# EAGLE board Schematic_proiect_pcb v13 (EAGLE 9.7.0)
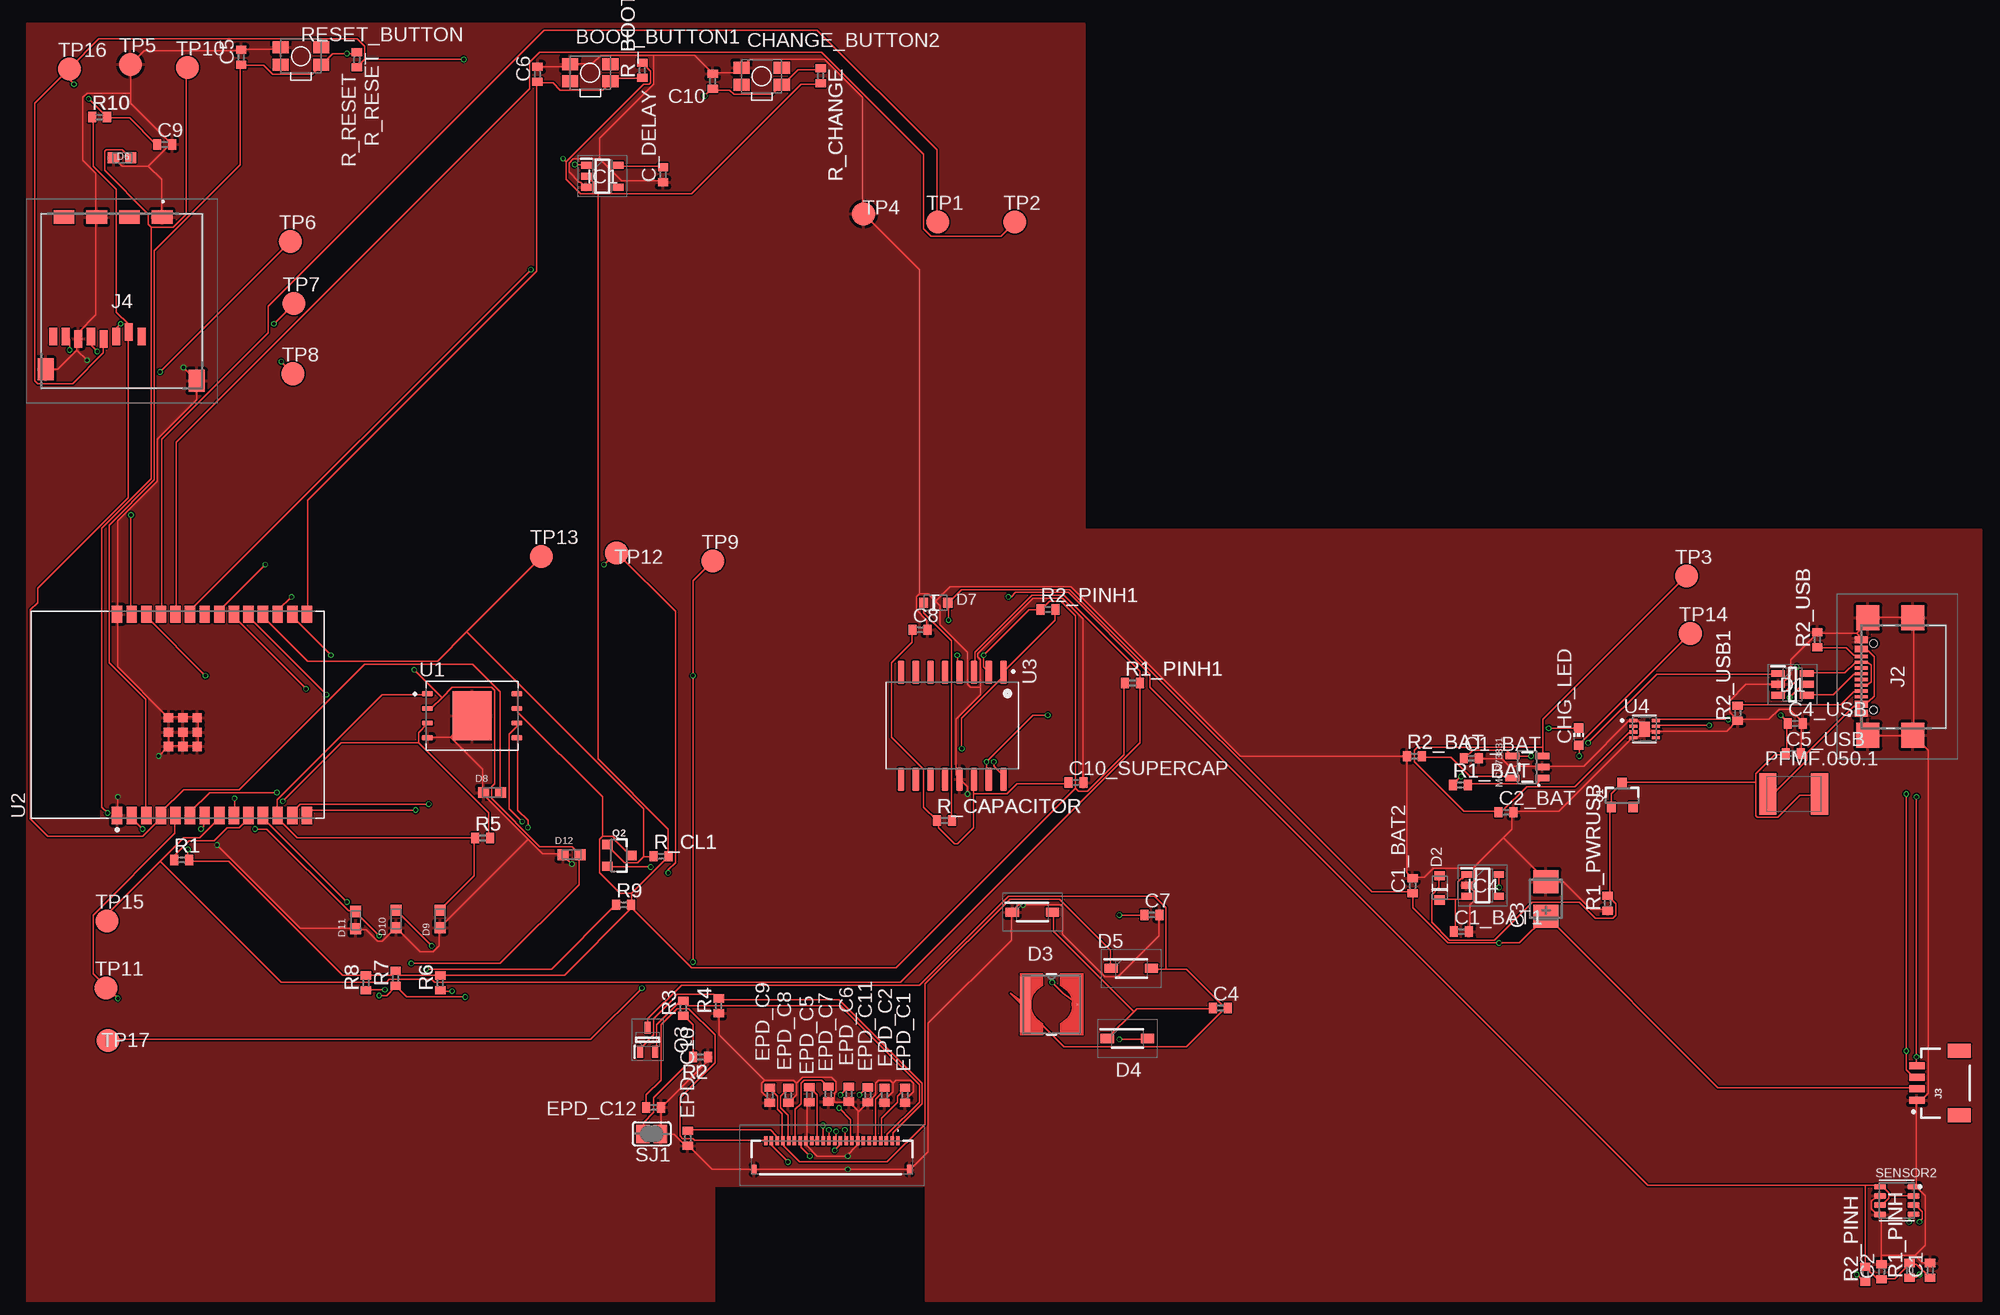
[diagram p0: board, top side]
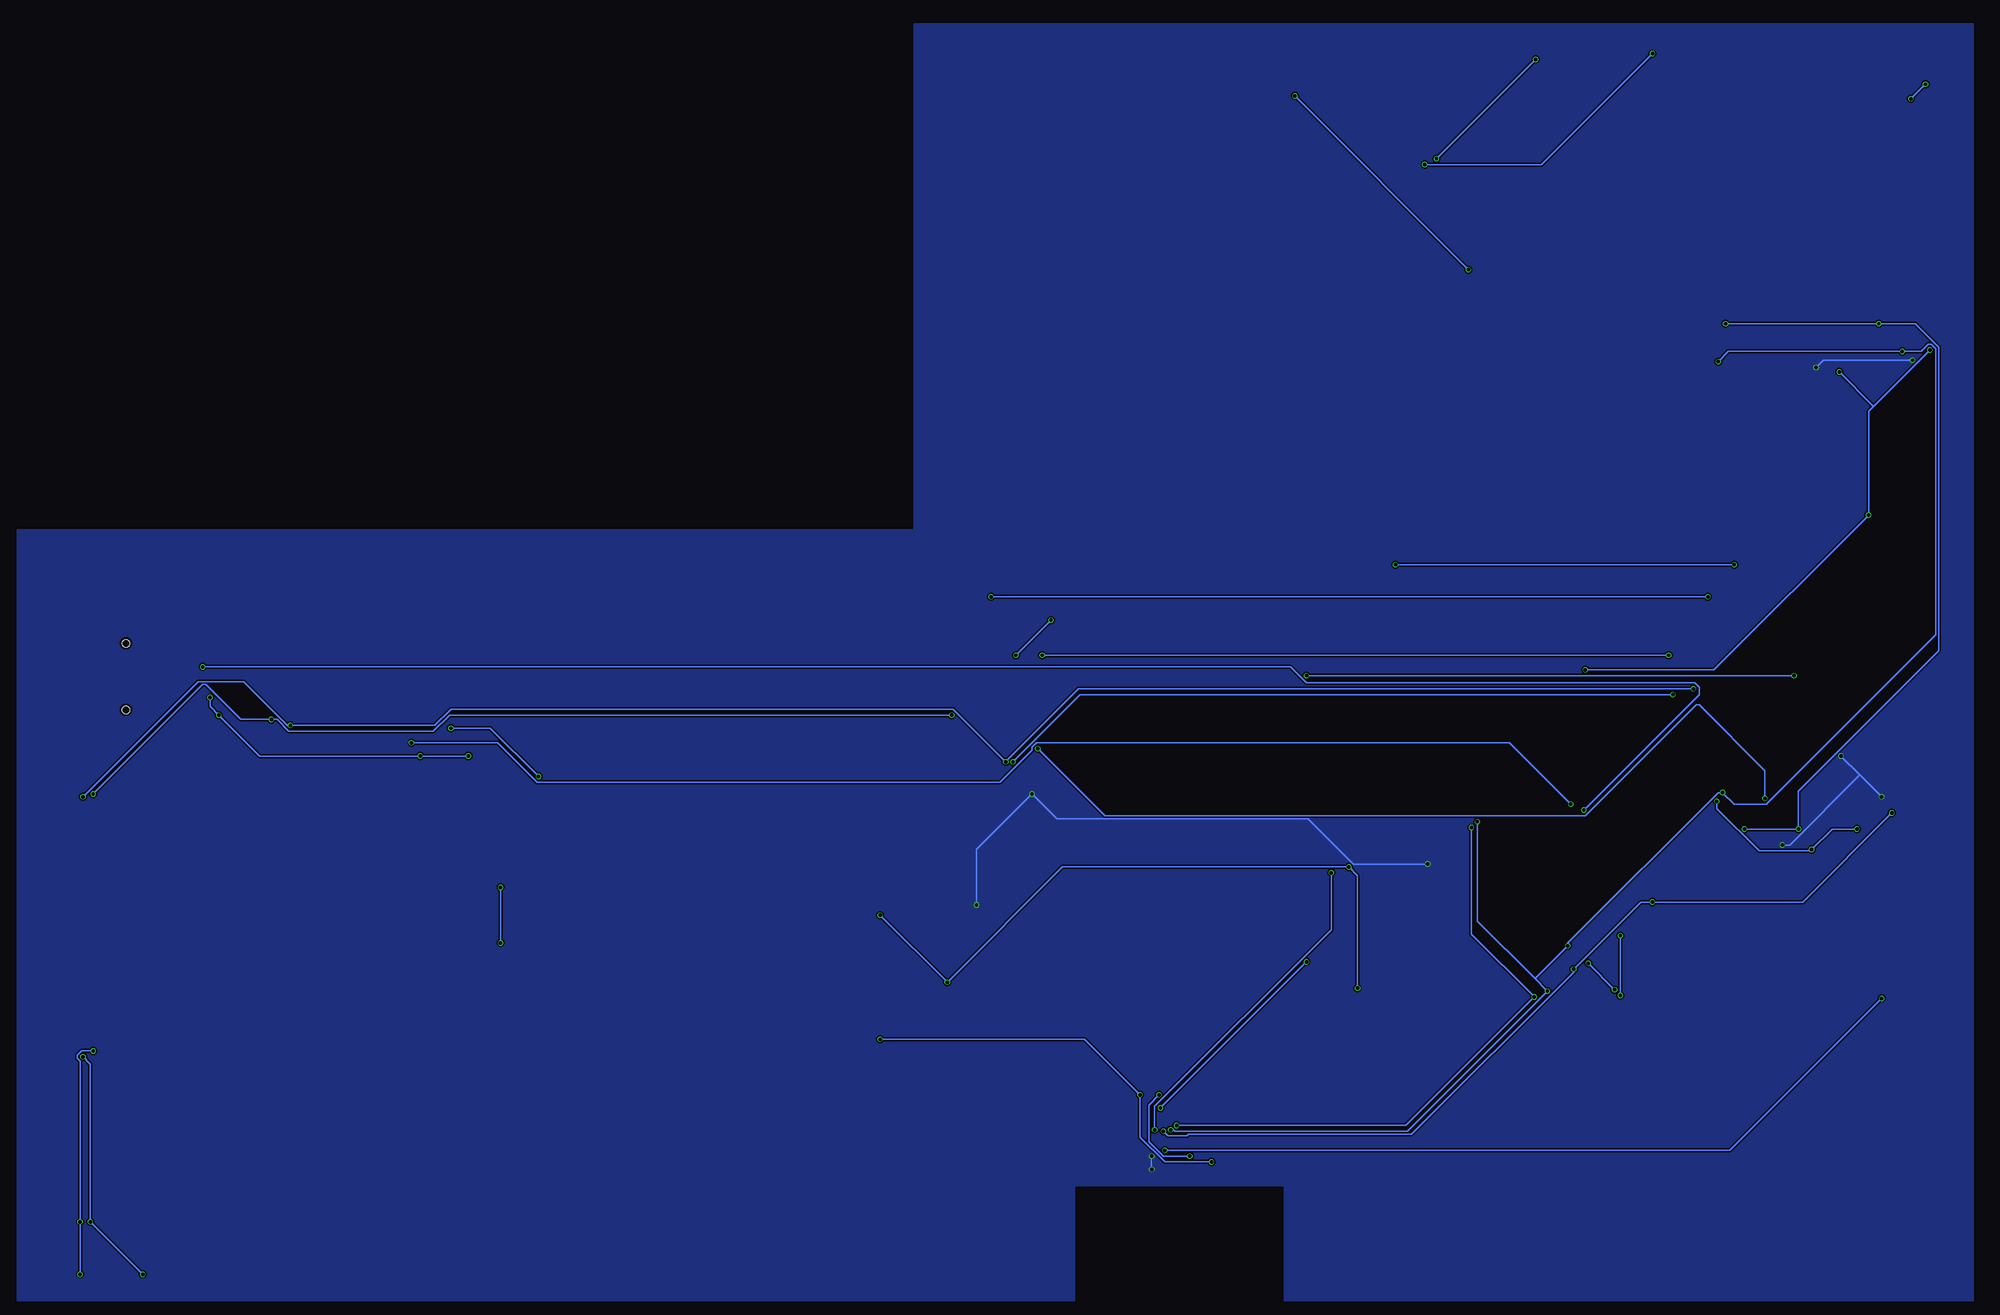
[diagram p1: board, bottom side, seen from below]

No outline drawn. Coordinates in mm, seen from the top.
Copper layers (1*16): Top 0.035mm / dielectric 1.6mm / Bottom 0.035mm
Design rules "jlcpcb-2layers.dru": minimum track width 5mil, minimum drill 0.3mm, track to track 5mil, track to pad 5mil, pad to pad 5mil, via to via 5mil, smd to smd 5mil, copper to edge 0.2mm, drill to drill 6mil, minimum pad ring 10mil, minimum via ring 3mil, stop-mask expansion 4mil, vias tented up to drill 0mil, thermal gap 10mil

## Footprints (pad centres in the part's own frame; a part is rotated, then mirrored left to right if it is on the bottom)
MYBUTTON = smd 1.4 x 1.05: 1 1.75,0.75; 2 -1.75,0.75; 3 -1.75,-0.75; 4 1.75,-0.75
EAGLE-LTSPICE_C0402 = smd 0.7 x 0.9: 1 -0.65,0; 2 0.65,0
RCL_CT3528 = smd 2 x 2.2: + -1.5,0; - 1.5,0
ADAFRUIT_CHIP-LED0603 = smd 0.8 x 0.8: A 0,-0.75; C 0,0.75
SOT95P280X145-6N = smd 1.2 x 0.6: 1 -1.25,0.95; 2 -1.25,0; 3 -1.25,-0.95; 4 1.25,-0.95; 5 1.25,0; 6 1.25,0.95
ESP32_WROVER_AVX---SD0805S020S1R0_AVX_SD0805S020S1R0_0 = smd 0.8 x 0.9: 1 -1.05,0; 2 1.05,0
SOD3716X135N = smd 1.15 x 0.8: 1 -1.75,0; 2 1.75,0
DIOC1608X36N = smd 0.97 x 0.94: 1 -0.75,0; 2 0.75,0
FH34SRJ24S05SH99 = smd 0.3 x 0.8: 1 5.75,1.45; 2 5.25,1.45; 3 4.75,1.45; 4 4.25,1.45; 5 3.75,1.45; 6 3.25,1.45; 7 2.75,1.45; 8 2.25,1.45; 9 1.75,1.45; 10 1.25,1.45; 11 0.75,1.45; 12 0.25,1.45; 13 -0.25,1.45; 14 -0.75,1.45; 15 -1.25,1.45; 16 -1.75,1.45; 17 -2.25,1.45; 18 -2.75,1.45; 19 -3.25,1.45; 20 -3.75,1.45; 21 -4.25,1.45; 22 -4.75,1.45; 23 -5.25,1.45; 24 -5.75,1.45 | smd 0.4 x 0.8: MP1 6.75,-1.05; MP2 -6.75,-1.05
SOT95P280X125-5N = smd 0.9 x 0.6: 1 -1.4,0.95; 2 -1.4,0; 3 -1.4,-0.95; 4 1.4,-0.95; 5 1.4,0.95
SOT95P280X120-5N = smd 0.9 x 0.6: 1 -1.4,0.95; 2 -1.4,0; 3 -1.4,-0.95; 4 1.4,-0.95; 5 1.4,0.95
SAMACSYS_PARTS_USB4110GFA = smd 0.3 x 1.15: A1 -3.35,3.678; A4 -2.55,3.678; A5 -1.25,3.678; A6 -0.25,3.678; A7 0.25,3.678; A8 1.25,3.678; A9 2.55,3.678; A12 3.35,3.678; B1 3.05,3.678; B4 2.25,3.678; B5 1.75,3.678; B6 0.75,3.678; B7 -0.75,3.678; B8 -1.75,3.678; B9 -2.25,3.678; B12 -3.05,3.678 | smd 2.18 x 2: MP1 -5.11,-0.827; MP2 5.11,-0.827; MP3 -5.11,3.103; MP4 5.11,3.103 | hole 0.65: -2.89,2.603; 2.89,2.603
JST04_1MM_RA = smd 0.6 x 1.35: 1 -1.5,0; 2 -0.5,0; 3 0.5,0; 4 1.5,0 | smd 1.2 x 2: NC1 2.8,-3.675; NC2 -2.8,-3.675
112ATAARR03ATTEND = smd 1.8 x 1.2: G1 10.6,10.4; G2 4.9,10.4; S1 7.75,10.4; S2 2.05,10.4 | smd 1.4 x 1.9: G3 13.6,-3.85; G4 0.45,-2.85 | smd 0.7 x 1.5: P1 8.8,0; P2 7.7,0.4; P3 6.6,0; P4 5.5,-0.2; P5 4.4,0; P6 3.3,-0.2; P7 2.2,0; P8 1.1,0
IND_4828-WE-TPC_WRE = smd 0.889 x 4.826: 1 -2.286,0 | smd 0.127 x 0.127: 2 2.286,0
ESP32_WROVER_SPARKFUN-IC-POWER_SOT23-5 = smd 0.55 x 1.2: 1 -0.95,-1.3; 2 0,-1.3; 3 0.95,-1.3; 4 0.95,1.3; 5 -0.95,1.3
ESP32C6_VARISTOR_CT/CN1812 = smd 1.5 x 3.6: 1 -2.25,0; 2 2.25,0
ESP32_WROVER_SPARKFUN-DISCRETESEMI_SOT23-3 = smd 0.8 x 0.9: 1 -0.95,-1; 2 0.95,-1; 3 0,1.1
SOT65P210X110-3N = smd 1.05 x 0.5: 1 -1.05,0.65; 2 -1.05,-0.65; 3 1.05,0
ESP32_WROVER_EAGLE-LTSPICE_R0402 = smd 0.7 x 0.9: 1 -0.65,0; 2 0.65,0
ESP32_WROVER_BME680_PSON80P300X300X100-8N = smd 1.016 x 0.5: 1 1.458,1.2; 2 1.458,0.4; 3 1.458,-0.4; 4 1.458,-1.2; 5 -1.458,-1.22; 6 -1.458,-0.4; 7 -1.458,0.4; 8 -1.458,1.2
SJ = smd 1.168 x 1.6: 1 -0.762,0; 2 0.762,0
TP20R = smd 2 x 2: TP 0,0
SON127P600X800X80-9N = smd 0.94 x 0.44: 1 -3.895,1.905; 2 -3.895,0.635; 3 -3.895,-0.635; 4 -3.895,-1.905; 5 3.895,-1.905; 6 3.895,-0.635; 7 3.895,0.635; 8 3.895,1.905 | smd 3.4 x 4.3: 9 0,0
XCVR_ESP32-C6-WROOM-1-N8 = smd 1.5 x 0.9: 1 -8.75,5.26; 2 -8.75,3.99; 3 -8.75,2.72; 4 -8.75,1.45; 5 -8.75,0.18; 6 -8.75,-1.09; 7 -8.75,-2.36; 8 -8.75,-3.63; 9 -8.75,-4.9; 10 -8.75,-6.17; 11 -8.75,-7.44; 12 -8.75,-8.71; 13 -8.75,-9.98; 14 -8.75,-11.25; 15 8.75,-11.25; 16 8.75,-9.98; 17 8.75,-8.71; 18 8.75,-7.44; 19 8.75,-6.17; 20 8.75,-4.9; 21 8.75,-3.63; 22 8.75,-2.36; 23 8.75,-1.09; 24 8.75,0.18; 25 8.75,1.45; 26 8.75,2.72; 27 8.75,3.99; 28 8.75,5.26 | smd 0.8 x 0.8: 29_1 -2.755,0.79; 29_2 -1.505,0.79; 29_3 -0.255,0.79; 29_4 -2.755,-0.46; 29_5 -1.505,-0.46; 29_6 -0.255,-0.46; 29_7 -2.755,-1.71; 29_8 -1.505,-1.71; 29_9 -0.255,-1.71
SOIC127P1032X265-16N = smd 2.05 x 0.59: 1 -4.655,4.445; 2 -4.655,3.175; 3 -4.655,1.905; 4 -4.655,0.635; 5 -4.655,-0.635; 6 -4.655,-1.905; 7 -4.655,-3.175; 8 -4.655,-4.445; 9 4.655,-4.445; 10 4.655,-3.175; 11 4.655,-1.905; 12 4.655,-0.635; 13 4.655,0.635; 14 4.655,1.905; 15 4.655,3.175; 16 4.655,4.445
SON50P200X200X80-9N = smd 0.76 x 0.27: 1 -0.985,0.75; 2 -0.985,0.25; 3 -0.985,-0.25; 4 -0.985,-0.75; 5 0.985,-0.75; 6 0.985,-0.25; 7 0.985,0.25; 8 0.985,0.75 | smd 0.9 x 1.3: 9 0,0

## Placement (x,y rotation side)
BOOT_BUTTON1  BUTTON_CUSYOMV1  [MYBUTTON]  49.1,83.67 0 top
C1  100uF  [EAGLE-LTSPICE_C0402]  165.65,-20.48 90 top
C1_BAT  4.7uF  [EAGLE-LTSPICE_C0402]  125.75,24.06 0 top
C1_BAT1  4.7uF  [EAGLE-LTSPICE_C0402]  124.89,8.98 0 top
C1_BAT2  4.7uF  [EAGLE-LTSPICE_C0402]  120.63,12.98 90 top
C2  100uF  [EAGLE-LTSPICE_C0402]  161.43,-20.58 90 top
C2_BAT  4.7uF  [EAGLE-LTSPICE_C0402]  128.76,19.36 0 top
C3  100uF  [RCL_CT3528]  132.23,11.84 90 top
C4  10uF  [EAGLE-LTSPICE_C0402]  103.9,2.34 0 top
C4_USB  100nF  [EAGLE-LTSPICE_C0402]  153.93,27.08 0 top
C5  1uF  [EAGLE-LTSPICE_C0402]  18.73,85.02 90 top
C5_USB  100nF  [EAGLE-LTSPICE_C0402]  153.74,24.48 0 top
C6  100nF  [EAGLE-LTSPICE_C0402]  44.51,83.54 90 top
C7  10uF  [EAGLE-LTSPICE_C0402]  97.95,10.44 0 top
C8  100uF  [EAGLE-LTSPICE_C0402]  77.79,35.24 0 top
C9  100nF  [EAGLE-LTSPICE_C0402]  12.07,77.44 0 top
C10  100nF  [EAGLE-LTSPICE_C0402]  59.75,82.94 90 top
C10_SUPERCAP  100uF  [EAGLE-LTSPICE_C0402]  91.34,21.95 0 top
C_DELAY  100nF  [EAGLE-LTSPICE_C0402]  55.44,74.8 90 top
CHANGE_BUTTON2  BUTTON_CUSYOMV1  [MYBUTTON]  64.01,83.37 0 top
CHG_LED  [ADAFRUIT_CHIP-LED0603]  135.08,25.95 0 top
D1  USBLC6-2SC6Y  [SOT95P280X145-6N]  153.68,30.48 0 top
D2  ESP32_WROVER_AVX---SD0805S020S1R0_AVX_SD0805S020S1R0_0_0AVX_SD0805S020S1R0_0_0  [ESP32_WROVER_AVX---SD0805S020S1R0_AVX_SD0805S020S1R0_0]  122.99,12.79 90 top
D3  MBR0530  [SOD3716X135N]  87.56,10.68 0 top
D4  MBR0530  [SOD3716X135N]  95.82,-0.31 0 top
D5  MBR0530  [SOD3716X135N]  96.16,5.79 0 top
D6  PGB1010603MR  [DIOC1608X36N]  8.38,76.28 0 top
D7  ESP32_WROVER_AVX---SD0805S020S1R0_AVX_SD0805S020S1R0_0_0AVX_SD0805S020S1R0_0_0  [ESP32_WROVER_AVX---SD0805S020S1R0_AVX_SD0805S020S1R0_0]  79.14,37.59 0 top
D8  PGB1010603MR  [DIOC1608X36N]  40.56,21.08 0 top
D9  PGB1010603MR  [DIOC1608X36N]  36.04,10.08 90 top
D10  PGB1010603MR  [DIOC1608X36N]  32.22,10.08 90 top
D11  PGB1010603MR  [DIOC1608X36N]  28.7,9.98 90 top
D12  PGB1010603MR  [DIOC1608X36N]  47.48,15.68 0 top
EPD_C1  1uF/50V  [EAGLE-LTSPICE_C0402]  76.48,-5.24 90 top
EPD_C2  1uF/50V  [EAGLE-LTSPICE_C0402]  74.69,-5.24 90 top
EPD_C5  0.1uF/50V  [EAGLE-LTSPICE_C0402]  68.16,-5.2 90 top
EPD_C6  1uF/50V  [EAGLE-LTSPICE_C0402]  71.6,-5.14 90 top
EPD_C7  1uF/50V  [EAGLE-LTSPICE_C0402]  69.81,-5.14 90 top
EPD_C8  1uF/50V  [EAGLE-LTSPICE_C0402]  66.32,-5.24 90 top
EPD_C9  1uF/50V  [EAGLE-LTSPICE_C0402]  64.73,-5.24 90 top
EPD_C10  1uF/50V  [EAGLE-LTSPICE_C0402]  57.58,-9 90 top
EPD_C11  1uF/50V  [EAGLE-LTSPICE_C0402]  73.25,-5.22 90 top
EPD_C12  1uF/50V  [EAGLE-LTSPICE_C0402]  54.62,-6.3 180 top
FH34SRJ-24S-0.5SH_99_  FH34SRJ-24S-0.5SH_99_  [FH34SRJ24S05SH99]  70.11,-10.66 0 top
IC1  BD5229G-TR  [SOT95P280X125-5N]  50.15,74.68 0 top
IC4  XC6220A331MR-G  [SOT95P280X120-5N]  126.73,13 0 top
J2  SAMACSYS_PARTS_USB4110-GF-A  [SAMACSYS_PARTS_USB4110GFA]  163.33,31.16 90 top
J3  QWIIC_RIGHT_ANGLE  [JST04_1MM_RA]  164.51,-4.18 90 top
J4  112A-TAAR-R03_ATTEND  [112ATAARR03ATTEND]  1.27,60.73 0 top
L1  744043680IND_4828-WE-TPC_WRE  [IND_4828-WE-TPC_WRE]  89.23,2.65 0 top
MCP73831  ESP32_WROVER_SPARKFUN-IC-POWER_MCP73831  [ESP32_WROVER_SPARKFUN-IC-POWER_SOT23-5]  130.61,23.3 90 top
PFMF.050.1  ESP32C6_VARISTORCN1812  [ESP32C6_VARISTOR_CT/CN1812]  153.78,20.94 0 top
Q1  20V/4.2A/52mΩ/1.4W  [ESP32_WROVER_SPARKFUN-DISCRETESEMI_SOT23-3]  138.86,20.81 0 top
Q2  20V/4.2A/52mΩ/1.4W  [ESP32_WROVER_SPARKFUN-DISCRETESEMI_SOT23-3]  51.58,15.61 270 top
Q3  SI1308EDL-T1-GE3  [SOT65P210X110-3N]  54.09,-0.41 90 top
R1  10k  [ESP32_WROVER_EAGLE-LTSPICE_R0402]  13.55,15.22 0 top
R1_BAT  200  [ESP32_WROVER_EAGLE-LTSPICE_R0402]  124.78,21.74 0 top
R1_PINH  10k  [ESP32_WROVER_EAGLE-LTSPICE_R0402]  163.87,-20.48 90 top
R1_PINH1  10k  [ESP32_WROVER_EAGLE-LTSPICE_R0402]  96.28,30.6 0 top
R1_PWRUSB  100k  [ESP32_WROVER_EAGLE-LTSPICE_R0402]  137.6,11.45 90 top
R2  2.2  [ESP32_WROVER_EAGLE-LTSPICE_R0402]  58.71,-1.92 180 top
R2_BAT  2K  [ESP32_WROVER_EAGLE-LTSPICE_R0402]  120.79,24.24 0 top
R2_PINH  10k  [ESP32_WROVER_EAGLE-LTSPICE_R0402]  160.01,-20.82 90 top
R2_PINH1  10k  [ESP32_WROVER_EAGLE-LTSPICE_R0402]  88.92,37 0 top
R2_USB  5k1  [ESP32_WROVER_EAGLE-LTSPICE_R0402]  155.84,34.36 90 top
R2_USB1  5k1  [ESP32_WROVER_EAGLE-LTSPICE_R0402]  148.91,27.98 90 top
R3  0.47  [ESP32_WROVER_EAGLE-LTSPICE_R0402]  57.19,2.32 90 top
R4  10k  [ESP32_WROVER_EAGLE-LTSPICE_R0402]  60.27,2.52 90 top
R5  10K  [ESP32_WROVER_EAGLE-LTSPICE_R0402]  39.73,17.12 0 top
R6  10K  [ESP32_WROVER_EAGLE-LTSPICE_R0402]  36.05,4.52 90 top
R7  10K  [ESP32_WROVER_EAGLE-LTSPICE_R0402]  32.17,4.92 90 top
R8  10K  [ESP32_WROVER_EAGLE-LTSPICE_R0402]  29.59,4.52 90 top
R9  10K  [ESP32_WROVER_EAGLE-LTSPICE_R0402]  52.01,11.32 0 top
R10  10K  [ESP32_WROVER_EAGLE-LTSPICE_R0402]  6.41,79.82 0 top
R_BOOT  10K  [ESP32_WROVER_EAGLE-LTSPICE_R0402]  53.62,83.88 90 top
R_CAPACITOR  10k  [ESP32_WROVER_EAGLE-LTSPICE_R0402]  79.9,18.65 0 top
R_CHANGE  10K  [ESP32_WROVER_EAGLE-LTSPICE_R0402]  69.14,83.4 270 top
R_CL1  10k  [ESP32_WROVER_EAGLE-LTSPICE_R0402]  55.27,15.54 0 top
R_RESET  10K  [ESP32_WROVER_EAGLE-LTSPICE_R0402]  28.8,84.8 270 top
RESET_BUTTON  BUTTON_CUSYOMV1  [MYBUTTON]  23.93,85.13 0 top
SENSOR2  ESP32_WROVER_BME680_BME680  [ESP32_WROVER_BME680_PSON80P300X300X100-8N]  162.74,-14.4 0 top
SJ1  [SJ]  54.44,-8.6 180 top
TP1  TPTP20R  [TP20R]  79.31,70.7 0 top
TP2  TPTP20R  [TP20R]  86.03,70.7 0 top
TP3  TPTP20R  [TP20R]  144.45,39.9 0 top
TP4  TPTP20R  [TP20R]  72.87,71.4 0 top
TP5  TPTP20R  [TP20R]  9.09,84.4 0 top
TP6  TPTP20R  [TP20R]  23.01,69 0 top
TP7  TPTP20R  [TP20R]  23.33,63.6 0 top
TP8  TPTP20R  [TP20R]  23.25,57.5 0 top
TP9  TPTP20R  [TP20R]  59.77,41.2 0 top
TP10  TPTP20R  [TP20R]  14.04,84.12 0 top
TP11  TPTP20R  [TP20R]  6.99,4.1 0 top
TP12  TPTP20R  [TP20R]  51.39,41.92 0 top
TP13  TPTP20R  [TP20R]  44.84,41.62 0 top
TP14  TPTP20R  [TP20R]  144.79,34.92 0 top
TP15  TPTP20R  [TP20R]  7.04,9.92 0 top
TP16  TPTP20R  [TP20R]  3.79,84 0 top
TP17  TPTP20R  [TP20R]  7.14,-0.5 0 top
U1  W25Q512JVEIQ  [SON127P600X800X80-9N]  38.83,27.76 0 top
U2  ESP32-C6-WROOM-1-N8  [XCVR_ESP32-C6-WROOM-1-N8]  13.2,27.84 90 top
U3  DS3231SN#  [SOIC127P1032X265-16N]  80.59,26.9 270 top
U4  MAX17048G+T10  [SON50P200X200X80-9N]  140.8,26.6 0 top

## Library data of the parts
BOOT_BUTTON1 CHANGE_BUTTON2 CHG_LED PFMF.050.1 RESET_BUTTON SJ1 TP1-TP17 = DeskAssistant v19 v1
C1 C1_BAT C1_BAT1 C1_BAT2 C2 C2_BAT C4 C4_USB C5 C5_USB C6-C10 C10_SUPERCAP C_DELAY EPD_C1 EPD_C2 EPD_C5-EPD_C12 = DeskAssistant v19 v1; SPICEMODEL: NONE; SPICEPREFIX: C
C3 = DeskAssistant v19 v1; SPICEPREFIX: C
D1 = DeskAssistant v19 v1; AVAILABILITY: In Stock; CHECK_PRICES: https://www.snapeda.com/parts/USBLC6-2SC6Y/STMicroelectronics/view-part/?ref=eda; DESCRIPTION: 17V Clamp 5A (8/20µs) Ipp Tvs Diode Surface Mount SOT-23-6; MF: STMicroelectronics; MP: USBLC6-2SC6Y; PACKAGE: SOT-23-6 STMicroelectronics; PRICE: None; SNAPEDA_LINK: https://www.snapeda.com/parts/USBLC6-2SC6Y/STMicroelectronics/view-part/?ref=snap
D2 D7 = DeskAssistant v19 v1; CENTROID_NOT_SPECIFIED: No; DATASHEET: http://datasheets.avx.com/schottky.pdf; DIGIKEY_DESCRIPTION: DIODE SCHOTTKY 20V 1A 0805; DIGIKEY_PART_NUMBER: 478-7800-1-ND; LEAD_FREE: yes; MF: AVX; MOUSER_PART_NUMBER: 581-SD0805S020S1R0; PACKAGE: 0805 (2012 metric); PREFIX: D; ROHS: yes; TEMPERATURE_RANGE_HIGH: +125°C; TEMPERATURE_RANGE_LOW: -55°C
D3-D5 = DeskAssistant v19 v1; AVAILABILITY: In Stock; CHECK_PRICES: https://www.snapeda.com/parts/MBR0530/Onsemi/view-part/?ref=eda; DESCRIPTION: Diode Schottky 30 V 500mA Surface Mount SOD-123; MF: ON Semiconductor; MP: MBR0530; PACKAGE: SOD-123-2 ON Semiconductor; PRICE: None; PURCHASE-URL: https://www.snapeda.com/api/url_track_click_mouser/?unipart_id=179458&manufacturer=ON Semiconductor&part_name=MBR0530&search_term=None; SNAPEDA_LINK: https://www.snapeda.com/parts/MBR0530/Onsemi/view-part/?ref=snap
D6 D8-D12 = DeskAssistant v19 v1; AVAILABILITY: In Stock; CHECK_PRICES: https://www.snapeda.com/parts/PGB1010603MR/Littelfuse/view-part/?ref=eda; DESCRIPTION: 150V (Typ) Clamp - Ipp Tvs Diode Surface Mount 0603 (1608 Metric); MF: Littelfuse Inc.; MP: PGB1010603MR; PACKAGE: 0603 Littelfuse Inc.; PRICE: None; PURCHASE-URL: https://www.snapeda.com/api/url_track_click_mouser/?unipart_id=5659453&manufacturer=Littelfuse Inc.&part_name=PGB1010603MR&search_term=None; SNAPEDA_LINK: https://www.snapeda.com/parts/PGB1010603MR/Littelfuse/view-part/?ref=snap
FH34SRJ-24S-0.5SH_99_ = DeskAssistant v19 v1; DESCRIPTION: 24 Position FFC, FPC Connector Contacts, Top and Bottom 0.020" (0.50mm) Surface Mount, Right Angle; HEIGHT: 1.1mm; MANUFACTURER_NAME: Hirose; MANUFACTURER_PART_NUMBER: FH34SRJ-24S-0.5SH(99); MOUSER_PART_NUMBER: 798-FH34SRJ24S05SH99; MOUSER_PRICE-STOCK: https://www.mouser.co.uk/ProductDetail/Hirose-Connector/FH34SRJ-24S-0.5SH99?qs=vcbW%252B4%252BSTIpKBl5ap9J8Fw%3D%3D
IC1 = DeskAssistant v19 v1; DESCRIPTION: Voltage Detector with Adjustable Delay Time: CMOS processes are utilized to develop high precision, low current consumption CMOS reset ICs that allow arbitrary setting of the delay time. The extensive lineup includes both Nch Open Drain and CMOS output types in a wide range of detection voltages (from 2.3V to 6.0V, in 0.1V steps), enabling selection of the ideal solution based on customer requirements. In addition, the entire series is of course both lead-free and RoHS-compliant.; HEIGHT: 1.25mm; MANUFACTURER_NAME: ROHM Semiconductor; MANUFACTURER_PART_NUMBER: BD5229G-TR; MOUSER_PART_NUMBER: 755-BD5229G-TR; MOUSER_PRICE-STOCK: https://www.mouser.co.uk/ProductDetail/ROHM-Semiconductor/BD5229G-TR?qs=4kLU8WoGk0vvnhrrYwdszw%3D%3D
IC4 = DeskAssistant v19 v1; DESCRIPTION: LDO Voltage Regulators; HEIGHT: 1.2mm; MANUFACTURER_NAME: Torex; MANUFACTURER_PART_NUMBER: XC6220A331MR-G; MOUSER_PART_NUMBER: 865-XC6220A331MR-G; MOUSER_PRICE-STOCK: https://www.mouser.co.uk/ProductDetail/Torex-Semiconductor/XC6220A331MR-G?qs=AsjdqWjXhJ8ZSWznL1J0gg%3D%3D
J2 = DeskAssistant v19 v1; DESCRIPTION: CONN USB 2.0 TYPE-C R/A SMT; HEIGHT: 3.26mm; MANUFACTURER_NAME: GCT (GLOBAL CONNECTOR TECHNOLOGY); MANUFACTURER_PART_NUMBER: USB4110-GF-A; MOUSER_PART_NUMBER: 640-USB4110-GF-A; MOUSER_PRICE-STOCK: https://www.mouser.co.uk/ProductDetail/GCT/USB4110-GF-A?qs=KUoIvG%2F9IlYiZvIXQjyJeA%3D%3D
J3 = DeskAssistant v19 v1; PROD_ID: CONN-13694
J4 = DeskAssistant v19 v1; DESCRIPTION: Micro SD Card Socket, Push-Push Type, Top Mount, SMT, H=1.83mm, 10u; HEIGHT: 1.9mm; MANUFACTURER_NAME: ATTEND; MANUFACTURER_PART_NUMBER: 112A-TAAR-R03 ATTEND
L1 = DeskAssistant v19 v1; COPYRIGHT: Copyright (C) 2024 Ultra Librarian. All rights reserved.; MANUFACTURER_PART_NUMBER: 744043680; MFR_NAME: Wurth Electronics
MCP73831 = DeskAssistant v19 v1; PROD_ID: IC-09995
Q1 Q2 = DeskAssistant v19 v1; PROD_ID: TRAN-14388
Q3 = DeskAssistant v19 v1; AVAILABILITY: In Stock; CHECK_PRICES: https://www.snapeda.com/parts/SI1308EDL-T1-GE3/Vishay+Siliconix/view-part/?ref=eda; DESCRIPTION: Si1308EDL-T1-GE3 N-channel MOSFET Transistor, 1.5 A, 30 V, 3-Pin SC-70 | Siliconix / Vishay SI1308EDL-T1-GE3; MF: Vishay Siliconix; MP: SI1308EDL-T1-GE3; PACKAGE: SOT-323 Vishay Semiconductor; PRICE: None; PURCHASE-URL: https://www.snapeda.com/api/url_track_click_mouser/?unipart_id=274603&manufacturer=Vishay Siliconix&part_name=SI1308EDL-T1-GE3&search_term=None; SNAPEDA_LINK: https://www.snapeda.com/parts/SI1308EDL-T1-GE3/Vishay+Siliconix/view-part/?ref=snap
R1 R1_BAT R1_PINH R1_PINH1 R1_PWRUSB R2 R2_BAT R2_PINH R2_PINH1 R2_USB R2_USB1 R3-R10 R_BOOT R_CAPACITOR R_CHANGE R_CL1 R_RESET = DeskAssistant v19 v1; SPICEMODEL: NONE; SPICEPREFIX: R
SENSOR2 = DeskAssistant v19 v1; AVAILABILITY: Unavailable; DESCRIPTION: Integrated Environmental Unit; MF: Bosch Sensortec; MP: BME680; PACKAGE: LGA-8 Bosch Tools; PRICE: None
U1 = DeskAssistant v19 v1; AVAILABILITY: In Stock; CHECK_PRICES: https://www.snapeda.com/parts/W25Q512JVEIQ/Winbond+Electronics/view-part/?ref=eda; DESCRIPTION: FLASH - NOR Memory IC 512Mb (64M x 8) SPI - Quad I/O 133 MHz 8-WSON (8x6); MF: Winbond Electronics; MP: W25Q512JVEIQ; PACKAGE: Package; PRICE: None; SNAPEDA_LINK: https://www.snapeda.com/parts/W25Q512JVEIQ/Winbond+Electronics/view-part/?ref=snap
U2 = DeskAssistant v19 v1; AVAILABILITY: In Stock; CHECK_PRICES: https://www.snapeda.com/parts/ESP32-C6-WROOM-1-N8/Espressif+Systems/view-part/?ref=eda; DESCRIPTION: Multiprotocol Modules ESP32-C6 module, Wi-Fi 6 in 2.4 GHz band, Bluetooth 5, Zigbee 3.0 and Thread. ESP34-WROOM Compatible - ENGINEERING SAMPLE; MF: Espressif Systems; MP: ESP32-C6-WROOM-1-N8; PACKAGE: None; PRICE: None; SNAPEDA_LINK: https://www.snapeda.com/parts/ESP32-C6-WROOM-1-N8/Espressif+Systems/view-part/?ref=snap
U3 = DeskAssistant v19 v1; AVAILABILITY: In Stock; CHECK_PRICES: https://www.snapeda.com/parts/DS3231SN%23/Analog+Devices/view-part/?ref=eda; DESCRIPTION: Extremely Accurate I²C-Integrated RTC/TCXO/Crystal; MF: Analog Devices; MP: DS3231SN#; PACKAGE: SOIC-16 Maxim; PRICE: None; PURCHASE-URL: https://www.snapeda.com/api/url_track_click_mouser/?unipart_id=99048&manufacturer=Analog Devices&part_name=DS3231SN#&search_term=None; SNAPEDA_LINK: https://www.snapeda.com/parts/DS3231SN%23/Analog+Devices/view-part/?ref=snap
U4 = DeskAssistant v19 v1; AVAILABILITY: In Stock; CHECK_PRICES: https://www.snapeda.com/parts/MAX17048G+T10/Analog+Devices/view-part/?ref=eda; DESCRIPTION: 3µA 1-Cell/2-Cell Fuel Gauge with ModelGauge; MF: Analog Devices; MP: MAX17048G+T10; PACKAGE: TDFN-8 Maxim; PRICE: None; PURCHASE-URL: https://www.snapeda.com/api/url_track_click_mouser/?unipart_id=329239&manufacturer=Analog Devices&part_name=MAX17048G+T10&search_term=None; SNAPEDA_LINK: https://www.snapeda.com/parts/MAX17048G+T10/Analog+Devices/view-part/?ref=snap

## Nets
3V3: C1_BAT2.1 C3.+ C9.1 D7.2 IC1.2 IC4.5 J3.2 J4.P4 Q2.3 R1.2 R1_PINH1.1 R2_PINH1.1 R5.2 R6.2 R7.2 R8.2 R9.2 R10.2 R_BOOT.2 R_CHANGE.2 R_CL1.2 R_RESET.2 TP16.TP U1.3 U1.7 U1.8 U2.2 U3.2
32KHZ: R2_PINH1.2 U2.9 U3.1
DN: D1.6 J2.A8 J2.B7
DP: D1.4 J2.A7 J2.B6
EPD_3V3: C7.1 L1.2 Q2.2 TP17.TP
EPD_3V3_C: Q2.1 R_CL1.1 TP13.TP U2.18
EPD_BUSY: FH34SRJ-24S-0.5SH_99_.9 TP9.TP U2.26
EPD_CS: D6.2 FH34SRJ-24S-0.5SH_99_.12 R9.1 TP10.TP U2.11
EPD_DC: FH34SRJ-24S-0.5SH_99_.11 TP11.TP U2.5
EPD_RST: FH34SRJ-24S-0.5SH_99_.10 TP12.TP U2.21
FLASH_CS: D9.2 R5.1 U1.1 U2.12
GDR: FH34SRJ-24S-0.5SH_99_.2 Q3.1 R4.2
GND: BOOT_BUTTON1.2 C1.2 C1_BAT1.2 C1_BAT2.2 C1_BAT.2 C2.2 C2_BAT.2 C3.- C4_USB.2 C5.2 C5_USB.2 C6.2 C7.2 C8.2 C9.2 C10.2 C10_SUPERCAP.2 C_DELAY.1 CHANGE_BUTTON2.2 D1.2 D3.1 D6.1 D8.1 D9.1 D10.1 D11.1 D12.1 EPD_C1.1 EPD_C2.1 EPD_C5.1 EPD_C6.1 EPD_C7.1 EPD_C8.1 EPD_C9.1 EPD_C10.1 EPD_C11.1 EPD_C12.1 FH34SRJ-24S-0.5SH_99_.8 FH34SRJ-24S-0.5SH_99_.17 FH34SRJ-24S-0.5SH_99_.MP1 FH34SRJ-24S-0.5SH_99_.MP2 IC1.3 IC4.2 J2.A1 J2.A12 J2.B1 J2.B12 J2.MP1 J2.MP2 J2.MP3 J2.MP4 J3.1 J4.G1 J4.G2 J4.G3 J4.G4 J4.P6 MCP73831.2 R1_PWRUSB.1 R2.1 R2_BAT.1 R2_USB1.1 R2_USB.2 R4.1 RESET_BUTTON.2 SENSOR2.1 SENSOR2.5 SENSOR2.7 SJ1.1 TP4.TP TP5.TP U1.4 U1.9 U2.1 U2.28 U2.29_1 U2.29_2 U2.29_3 U2.29_4 U2.29_5 U2.29_6 U2.29_7 U2.29_8 U2.29_9 U3.13 U4.1 U4.4 U4.6 U4.9
GPIO8: R1.1 U2.10
I2C_PW: C1.1 C2.1 R1_PINH.2 R2_PINH.2 SENSOR2.2 SENSOR2.6 SENSOR2.8 U2.17
INT_RTC: R1_PINH1.2 TP15.TP U2.8 U3.3
IO/BOOT: BOOT_BUTTON1.4 C6.1 R_BOOT.1 U2.15
IO/CHANGE: C10.1 CHANGE_BUTTON2.4 R_CHANGE.1 U2.23
MISO: D12.2 J4.P7 R8.1 TP6.TP U1.2 U2.27
MOSI: D11.2 FH34SRJ-24S-0.5SH_99_.14 J4.P3 R7.1 TP7.TP U1.5 U2.7
N$1: J2.A5 R2_USB1.2
N$2: J2.B5 R2_USB.1
N$3: D7.1 R_CAPACITOR.2
N$5: MCP73831.1 R1_BAT.2
N$8: C4.1 D3.2 D4.1
N$9: CHG_LED.C R1_BAT.1
N$10: MCP73831.5 R2_BAT.2
N$11: EPD_C12.2 FH34SRJ-24S-0.5SH_99_.24
N$12: EPD_C5.2 FH34SRJ-24S-0.5SH_99_.15 FH34SRJ-24S-0.5SH_99_.16
N$13: EPD_C8.2 FH34SRJ-24S-0.5SH_99_.20
N$14: EPD_C10.2 FH34SRJ-24S-0.5SH_99_.22
N$15: EPD_C7.2 FH34SRJ-24S-0.5SH_99_.19
N$16: EPD_C6.2 FH34SRJ-24S-0.5SH_99_.18
N$17: EPD_C2.2 FH34SRJ-24S-0.5SH_99_.5
N$18: EPD_C1.2 FH34SRJ-24S-0.5SH_99_.4
N$19: C_DELAY.2 IC1.5
N$20: C1_BAT1.1 D2.1 IC4.1 IC4.3
PREVGH: D5.1 EPD_C9.2 FH34SRJ-24S-0.5SH_99_.21
PREVGL: D4.2 EPD_C11.2 FH34SRJ-24S-0.5SH_99_.23
RESE: FH34SRJ-24S-0.5SH_99_.3 Q3.2 R3.2
RESE': R2.2 R3.1 SJ1.2
RESET: C5.1 IC1.1 R_RESET.1 RESET_BUTTON.4 U2.3
RTC_RST: U2.16 U3.4
RX: TP2.TP U2.24
SCK: D10.2 FH34SRJ-24S-0.5SH_99_.13 J4.P5 R6.1 TP8.TP U1.6 U2.6
SCL: J3.4 R2_PINH.1 SENSOR2.4 U2.20 U3.16 U4.7
SDA: J3.3 R1_PINH.1 SENSOR2.3 U2.19 U3.15 U4.8
SRC: C4.2 D5.2 L1.1 Q3.3
SS_SD: D8.2 J4.P2 R10.1 U2.4
TX: TP1.TP U2.25
USB_D+: D1.3 U2.14
USB_D-: D1.1 U2.13
VBAT: C2_BAT.1 MCP73831.3 TP3.TP U4.2 U4.3
VBUS: C1_BAT.1 C4_USB.1 C5_USB.1 CHG_LED.A D1.5 D2.2 MCP73831.4 PFMF.050.1.2 Q1.1 Q1.3 R1_PWRUSB.2 TP14.TP
VRTC: C8.1 C10_SUPERCAP.1 R_CAPACITOR.1 U3.14
VUSB: J2.A4 J2.A9 J2.B4 J2.B9 PFMF.050.1.1

## Tracks (layer width: path | path; a pad name or v marks a point on that pad's centre or on a via)
3V3  (via drill 0.3)
  Top 0.127: v128.14,12.83 128.14,13.84 IC4.5 | J3.2 164.47,-4.57 147.19,-4.57 132.33,10.29 C3.+ 132.21,10.29 129.92,8 v128.14,8 123.7,8 120.65,11.05 120.65,12.32 C1_BAT2.1 120.52,12.45 117.09,12.45 90.81,38.73 81.41,38.73 80.26,37.59 D7.2 80.26,37.47 v80.26,36.07 | C9.1 11.3,77.47 9.02,79.76 7.11,79.76 R10.2 6.99,79.88 v5.46,81.41 | 29.46,84.84 28.83,84.2 R_RESET.2 | 29.46,84.84 29.46,85.98 28.83,86.61 6.35,86.61 3.81,84.07 TP16.TP | 3.3,83.57 3.68,83.95 TP16.TP | 3.3,83.57 0.76,81.03 0.76,56.9 1.02,56.64 4.06,56.64 6.73,59.31 6.73,60.45 J4.P4 | 3.3,83.57 v4.19,82.68 | 3.3,83.57 TP16.TP | 34.16,25.4 40.26,19.3 40.26,17.14 R5.2 | 34.16,25.4 34.16,26.29 34.92,27.05 U1.3 | v10.16,17.91 9.27,18.8 9.27,19.05 U2.2 | v14.1,16.13 14.1,15.24 R1.2 14.22,15.11 17.65,15.11 27.56,5.21 29.46,5.21 R8.2 29.59,5.21 31.88,5.21 32.13,5.46 R7.2 32.26,5.46 32.51,5.21 35.94,5.21 R6.2 36.07,5.21 46.86,5.21 52.7,11.05 | 34.16,25.4 27.43,25.4 v22.35,20.32 | 49.28,73.15 49.4,73.28 49.4,74.17 49.28,74.3 49.15,74.3 48.77,74.68 IC1.2 | 49.28,73.15 48.26,73.15 46.99,74.42 46.99,75.95 | 46.99,75.95 53.72,82.68 54.23,82.68 54.36,82.8 54.36,83.82 53.72,84.45 R_BOOT.2 | 49.28,73.15 49.78,73.15 | 49.78,73.15 57.91,73.15 67.44,82.68 69.09,82.68 R_CHANGE.2 | U3.2 83.69,31.62 83.31,32 v83.31,33.02 87.25,36.96 88.27,36.96 R2_PINH1.1 88.39,37.08 89.03,37.72 90.04,37.72 91.31,36.45 91.31,21.46 | 91.31,21.46 91.57,21.21 92.33,21.21 95.5,24.38 95.5,30.48 R1_PINH1.1 | U1.8 42.8,29.59 42.8,28.45 U1.7 42.8,28.32 42.8,28.07 50.16,20.7 50.16,17.27 | 52.7,12.32 52.7,11.43 R9.2 | 52.7,12.32 55.88,15.49 R_CL1.2 55.88,15.62 55.88,17.91 49.78,24 49.78,73.15
  Top 0.127: 50.16,17.27 51.05,17.27 51.31,17.02 51.31,16.89 52.58,15.62 Q2.3 | 50.16,17.27 49.91,17.02 49.91,14.1 51.69,12.32 52.7,12.32 | 91.31,21.46 75.69,5.84 57.91,5.84 52.7,11.05 | 52.7,11.05 52.7,11.3 R9.2 | 52.7,11.05 R9.2 | v38.1,84.84 29.46,84.84 | 46.99,75.95 v46.74,76.2
  Bottom 0.127: v128.14,8 v128.14,12.83 | v4.19,82.68 v5.46,81.41 | v10.16,17.91 12.32,17.91 v14.1,16.13 14.22,16 18.67,16 22.35,19.68 v22.35,20.32 | v83.31,33.02 v80.26,36.07 | v46.74,76.2 v38.1,84.84
32KHZ  (via drill 0.3)
  Top 0.127: R2_PINH1.2 89.53,36.96 89.53,36.07 85.09,31.62 U3.1 84.96,31.5 84.96,31.11 81.41,27.56 v81.41,24.89 | v18.16,20.57 18.16,19.18 U2.9
  Bottom 0.127: v18.16,20.57 18.16,22.99 23.88,28.7 24.13,28.7 33.78,19.05 75.56,19.05 v81.41,24.89
DN
  Top 0.127: J2.B7 159.77,30.48 160.27,30.48 160.53,30.73 160.53,32.13 160.27,32.38 159.77,32.38 J2.A8 159.64,32.38 159.13,32.38 158.24,31.5 154.94,31.5 D1.6
DP
  Top 0.127: J2.B6 159.64,31.88 159.64,31.5 J2.A7 159.64,31.37 159,31.37 157.23,29.59 154.94,29.59 D1.4
EPD_3V3  (via drill 0.3)
  Top 0.127: v54.36,14.61 50.67,14.61 Q2.2 | v89.28,4.57 90.22,3.64 L1.2 | v95.12,10.41 97.28,10.41 C7.1 | v53.59,4.06 49.15,-0.38 7.24,-0.38 TP17.TP
  Bottom 0.127: v95.12,10.41 v89.28,4.57 79.25,14.61 v54.36,14.61 53.59,13.84 v53.59,4.06
EPD_3V3_C
  Top 0.127: 53.72,15.49 54.61,15.49 R_CL1.1 | 53.72,15.49 53.21,14.99 52.07,14.99 50.55,16.51 Q2.1 | 38.35,35.05 44.83,41.53 TP13.TP | 38.35,35.05 35.81,32.51 24.51,32.51 20.7,36.32 20.7,36.58 U2.18 | 53.72,15.49 53.72,19.68 38.35,35.05
EPD_BUSY  (via drill 0.3)
  Top 0.127: v70.74,-6.35 71.75,-7.37 71.75,-9.14 FH34SRJ-24S-0.5SH_99_.9 | v58.04,6.35 v58.04,31.24 58.04,39.5 59.69,41.15 TP9.TP | v15.62,31.24 10.54,36.32 10.54,36.58 U2.26
  Bottom 0.127: v58.04,6.35 v70.74,-6.35 | v58.04,31.24 v15.62,31.24
EPD_CS  (via drill 0.3)
  Top 0.127: 10.92,70.23 10.67,70.48 10.67,71.37 6.86,75.18 6.86,76.83 6.99,76.96 8.38,76.96 9.02,76.33 D6.2 | 10.92,70.23 12.83,70.23 13.97,71.37 13.97,84.07 TP10.TP | v70.48,-8.38 70.48,-9.14 FH34SRJ-24S-0.5SH_99_.12 | v34.8,5.71 45.72,5.71 51.31,11.3 R9.1 | v27.94,11.56 20.7,18.8 20.7,19.05 U2.11 | 10.92,70.23 10.92,48.39 6.6,44.07 6.6,19.81 v7.11,19.3
  Bottom 0.127: v70.48,-8.38 70.1,-8.76 68.45,-8.76 68.33,-8.64 48.9,-8.64 34.8,5.46 v34.8,5.71 28.96,11.56 v27.94,11.56 14.86,11.56 v7.11,19.3
EPD_DC  (via drill 0.3)
  Top 0.127: v70.36,-10.03 70.74,-9.65 70.74,-9.27 FH34SRJ-24S-0.5SH_99_.11 | v8,3.17 7.11,4.06 TP11.TP 6.99,4.19 5.84,5.33 5.84,10.41 12.95,17.53 12.95,19.05 U2.5
  Bottom 0.127: v70.36,-10.03 21.21,-10.03 v8,3.17
EPD_RST  (via drill 0.3)
  Top 0.127: v71.25,-8.26 71.25,-9.14 FH34SRJ-24S-0.5SH_99_.10 | v55.88,14.1 55.88,14.35 56.52,14.99 56.52,36.83 51.44,41.91 TP12.TP 51.31,41.91 v50.29,40.89 | v20.83,40.89 16.89,36.96 16.89,36.7 U2.21
  Bottom 0.127: v71.25,-8.26 71.25,-6.22 55.88,9.14 v55.88,14.1 | v50.29,40.89 v20.83,40.89
FLASH_CS
  Top 0.127: D9.2 36.07,10.92 38.99,13.84 38.99,17.02 R5.1 38.99,17.14 23.62,17.14 21.97,18.8 21.97,19.05 U2.12 21.84,19.18 21.84,20.45 30.99,29.59 34.92,29.59 U1.1
GDR
  Top 0.127: FH34SRJ-24S-0.5SH_99_.2 75.44,-9.14 75.44,-8.51 77.98,-5.97 77.98,-4.19 70.74,3.05 60.33,3.05 R4.2 60.2,3.17 59.82,3.56 56.64,3.56 56.52,3.43 56.52,3.3 54.61,1.4 54.61,0 53.47,-1.14 53.47,-1.4 Q3.1
GND  (via drill 0.3)
  Top 0.127: 4.45,59.56 4.45,60.45 J4.P6 4.57,60.58 4.57,61.09 6.1,62.61 6.1,71.12 J4.G2 6.1,71.25 6.1,74.93 4.95,76.07 4.95,81.53 5.33,81.92 9.14,81.92 | 4.45,59.56 2.79,57.91 1.78,57.91 J4.G4 | RESET_BUTTON.2 22.1,85.85 21.97,85.72 18.8,85.72 C5.2 18.67,85.6 10.29,85.6 9.14,84.45 TP5.TP 9.14,84.33 9.14,81.92 | 10.67,75.56 12.45,77.34 12.7,77.34 C9.2 12.7,77.47 9.14,81.03 9.14,81.92 | 10.67,75.56 8.38,75.56 7.75,76.2 D6.1 | 10.67,75.56 11.81,74.42 11.81,71.25 J4.G1 | 36.96,25.91 35.05,25.91 U1.4 | 36.96,25.91 38.73,27.69 U1.9 | 36.96,25.91 39.75,23.11 39.75,21.08 D8.1 39.75,20.95 43.69,17.02 | 43.69,17.02 44.96,15.75 46.61,15.75 D12.1 46.74,15.62 v47.5,14.86 | 43.69,17.02 36.07,9.4 D9.1 35.94,9.27 35.94,7.75 35.43,7.24 34.29,7.24 32.26,9.27 D10.1 32.13,9.27 30.99,8.13 30.61,8.13 29.59,9.14 28.7,9.14 D11.1 28.57,9.27 23.88,9.27 v16.64,16.51 | 12.45,25.15 12.45,26.29 U2.29_2 | 13.72,25.15 13.72,26.29 U2.29_5 | 12.45,25.15 13.59,25.15 U2.29_4 13.72,25.15 | 12.45,25.15 U2.29_1 12.32,25.02 v11.56,24.26 | 13.72,25.15 14.86,25.15 U2.29_7 14.99,25.15 14.99,26.29 U2.29_8 14.99,26.42 14.99,27.56 U2.29_9 14.86,27.69 13.72,27.69 U2.29_6 13.59,27.69 12.45,27.69 U2.29_3 12.32,27.69 8,32 8,36.58 U2.28 8,36.7 8,44.7 11.43,48.13 11.43,51.82 14.86,55.24 14.86,56.77 J4.G3 14.86,56.9 v13.72,58.04 | v8,20.7 8,19.18 U2.1 | v5.33,58.67 4.45,59.56 | R1_PWRUSB.1 137.54,10.92 136.14,10.92 133.73,13.34 132.33,13.34 C3.- 132.21,13.46 128.52,17.14 | 125.48,12.95 125.35,13.08 IC4.2 125.48,12.95 | 125.48,12.95 125.98,12.45 125.98,11.68 125.6,11.3 125.6,9.02 C1_BAT1.2 | 125.86,14.48 122.43,14.48 121.67,13.72 120.65,13.72 C1_BAT2.2 120.52,13.72 120.14,14.1 120.14,24.13 R2_BAT.1 120.02,24.26 105.66,24.26 90.93,38.99 80.39,38.99 79.12,37.72
  Top 0.127: 125.86,14.48 125.98,14.35 125.98,13.46 125.48,12.95 | 125.86,14.48 128.52,17.14 | 128.52,17.14 129.29,17.91 129.29,19.3 C2_BAT.2 129.41,19.43 133.35,19.43 139.7,25.78 U4.4 139.83,25.91 140.21,25.91 140.72,26.42 | C1_BAT.2 126.49,24 128.4,24 129.03,23.37 131.83,23.37 MCP73831.2 131.95,23.37 135.51,23.37 139.45,27.3 139.7,27.3 U4.1 139.83,27.3 140.21,27.3 140.84,26.67 U4.9 | 140.72,26.42 140.84,26.54 U4.9 | 140.72,26.42 141.73,26.42 U4.6 141.86,26.42 147.96,26.42 148.84,27.3 R2_USB1.1 | 140.72,26.42 U4.9 | C5_USB.2 154.43,24.51 154.43,26.92 154.56,27.05 C4_USB.2 154.56,27.18 153.42,28.32 152.53,28.32 151.64,27.43 148.97,27.43 R2_USB1.1 | 161.42,-19.18 161.42,-15.75 SENSOR2.5 161.16,-15.49 160.91,-15.49 160.53,-15.11 160.53,-14.48 160.91,-14.1 161.16,-14.1 SENSOR2.7 | 161.42,-19.18 161.42,-19.81 C2.2 | 164.34,-19.18 164.97,-19.81 165.61,-19.81 C1.2 | 161.42,-19.18 164.34,-19.18 | 164.47,-13.21 164.21,-13.21 SENSOR2.1 164.47,-13.21 | 164.47,-13.21 165.23,-13.97 165.23,-18.29 164.34,-19.18 | 164.47,-13.21 164.47,-5.71 J3.1 164.59,-5.59 164.97,-5.59 165.48,-5.08 165.48,24.77 164.21,26.04 J2.MP1 | J2.B12 159.64,28.07 J2.A1 159.77,27.69 159.77,26.54 160.15,26.16 J2.MP3 160.27,26.04 164.08,26.04 J2.MP1 | 159.26,34.92 155.96,34.92 R2_USB.2 155.83,34.92 153.54,32.64 153.54,31.37 153.03,30.86 152.91,30.86 152.53,30.48 D1.2 149.61,30.48 148.21,29.08 148.21,28.07 148.84,27.43 R2_USB1.1 | 159.26,34.92 159.64,34.54 J2.A12 159.64,34.42 159.64,34.29 J2.B1 | 159.26,34.92 160.15,35.81 160.15,36.2 J2.MP4 160.27,36.32 164.08,36.32 J2.MP2 164.21,36.2 164.21,26.16 J2.MP1
  Top 0.127: 64.26,-3.94 64.01,-4.19 64.01,-4.95 64.64,-5.59 64.64,-5.84 EPD_C9.1 | 64.26,-3.94 66.8,-3.94 67.06,-4.19 | 67.06,-4.19 67.06,-5.21 66.42,-5.84 EPD_C8.1 | 64.26,-3.94 60.33,0 60.33,1.78 R4.1 | EPD_C5.1 68.07,-5.97 67.94,-6.1 67.94,-9.14 FH34SRJ-24S-0.5SH_99_.17 67.94,-9.27 67.94,-9.65 68.83,-10.54 71.37,-10.54 | 70.36,-5.84 71.5,-5.84 EPD_C6.1 71.63,-5.84 72.39,-6.6 72.52,-6.6 | 70.36,-5.84 69.85,-5.84 EPD_C7.1 | 72.52,-6.6 73.15,-5.97 EPD_C11.1 73.28,-5.84 73.91,-5.21 73.91,-4.19 74.17,-3.94 75.18,-3.94 75.44,-4.19 | 72.52,-6.6 72.39,-6.73 72.39,-9.14 FH34SRJ-24S-0.5SH_99_.8 72.26,-9.27 72.26,-9.65 71.37,-10.54 | 75.44,-4.19 75.44,-4.95 74.8,-5.59 74.8,-5.84 EPD_C2.1 | 75.44,-4.19 75.69,-3.94 76.96,-3.94 77.22,-4.19 77.22,-4.95 76.58,-5.59 76.58,-5.84 EPD_C1.1 | 67.06,-4.19 67.56,-3.68 70.1,-3.68 70.48,-4.06 70.48,-4.95 70.36,-5.08 70.36,-5.84 | C7.2 98.55,10.41 98.55,8.64 95,5.08 93.85,5.08 90.17,8.76 90.17,11.18 90.04,11.3 v86.74,11.3 86.36,11.3 85.85,10.79 D3.1 85.72,10.67 85.72,8.26 78.49,1.02 78.49,-10.16 76.96,-11.68 FH34SRJ-24S-0.5SH_99_.MP1 76.83,-11.68 v71.5,-11.68 63.37,-11.68 FH34SRJ-24S-0.5SH_99_.MP2 63.25,-11.68 59.69,-11.68 57.66,-9.65 EPD_C10.1 57.53,-9.53 57.28,-9.53 56.39,-8.64 55.24,-8.64 SJ1.1 55.24,-8.51 55.24,-6.35 EPD_C12.1 55.37,-6.22 59.31,-2.29 59.31,-2.03 R2.1 | v71.5,-10.54 71.37,-10.54 | 83.06,30.23 83.06,29.59 80.9,27.43 80.9,22.61 81.15,22.35 U3.13 81.28,22.23 81.92,21.59 v81.92,20.95 | 83.06,30.23 83.06,32.64 82.8,32.89 82.8,33.15 87.63,37.97 90.17,37.97 91.95,36.2 91.95,21.97 C10_SUPERCAP.2
  Top 0.127: 77.72,38.35 77.47,38.1 77.47,36.96 78.36,36.07 78.36,35.31 C8.2 | 77.72,38.35 78.49,38.35 79.12,37.72 | 79.12,37.72 79.5,37.34 79.5,35.69 81.92,33.27 81.92,30.48 82.17,30.23 83.06,30.23 | 49.91,76.2 47.62,76.2 47.24,75.82 47.24,75.06 48.13,74.17 48.26,74.17 48.64,73.79 IC1.3 | 49.91,76.2 51.82,74.3 55.24,74.3 55.37,74.17 C_DELAY.1 | C6.2 44.58,84.2 47.12,84.2 47.24,84.33 BOOT_BUTTON1.2 47.37,84.45 49.28,84.45 50.04,85.22 54.61,85.22 | 54.61,85.22 58.17,85.22 59.69,83.69 C10.2 59.82,83.69 61.85,83.69 62.23,84.07 CHANGE_BUTTON2.2 62.36,84.2 62.99,84.84 69.47,84.84 72.77,81.53 72.77,71.5 TP4.TP 72.9,71.37 77.72,66.55 77.72,38.35 | 49.91,76.2 49.91,77.98 54.61,82.68 54.61,85.22
  Bottom 0.127: v11.56,24.26 9.91,22.61 | 9.91,22.61 v8,20.7 | v16.64,16.51 16,16.51 9.91,22.61 | v5.33,58.67 13.08,58.67 v13.72,58.04 | v71.5,-11.68 v71.5,-10.54 | v86.74,11.3 86.74,16.13 v81.92,20.95 79.76,18.8 57.91,18.8 53.98,14.86 v47.5,14.86
  pour Top: 170.12,-23.12 170.12,43.92 92.18,43.92 92.16,43.94 92.14,43.96 92.12,43.98 92.12,87.92 0.08,87.92 0.08,-23.12 59.92,-23.12 59.92,-13.18 59.94,-13.16 59.96,-13.14 59.98,-13.12 78.22,-13.12 78.24,-13.14 78.26,-13.16 78.28,-13.18 78.28,-23.12
  pour Bottom: 170.12,-23.12 170.12,43.92 92.18,43.92 92.16,43.94 92.14,43.96 92.12,43.98 92.12,87.92 0.08,87.92 0.08,-23.12 59.92,-23.12 59.92,-13.18 59.94,-13.16 59.96,-13.14 59.98,-13.12 78.22,-13.12 78.24,-13.14 78.26,-13.16 78.28,-13.18 78.28,-23.12
GPIO8
  Top 0.127: R1.1 12.95,15.24 12.95,15.62 14.22,16.89 16.38,16.89 17.53,18.03 18.54,18.03 19.3,18.8 19.3,19.05 U2.10
I2C_PW  (via drill 0.3)
  Top 0.127: C1.1 165.61,-21.08 164.47,-19.94 163.96,-19.94 R1_PINH.2 163.83,-19.94 162.56,-21.21 161.54,-21.21 C2.1 161.42,-21.21 161.04,-21.21 160.02,-20.19 R2_PINH.2 160.02,-20.07 160.02,-13.08 | 162.05,-13.97 162.05,-13.72 161.54,-13.21 SENSOR2.8 161.16,-13.08 160.02,-13.08 | 162.05,-13.97 162.05,-14.22 161.54,-14.73 161.29,-14.73 SENSOR2.6 | 162.05,-13.97 164.08,-13.97 SENSOR2.2 | v23.11,38.1 21.97,36.96 21.97,36.7 U2.17 | v85.47,38.1 85.72,38.1 86.11,38.48 90.68,38.48 97.79,31.37 97.79,30.23 141.1,-13.08 160.02,-13.08
  Bottom 0.127: v85.47,38.1 v23.11,38.1
INT_RTC
  Top 0.127: 11.68,15.11 7.11,10.54 7.11,10.03 TP15.TP | 11.68,15.11 13.72,17.14 15.11,17.14 16.76,18.8 16.76,19.05 U2.8 | U3.3 82.55,31.62 82.55,33.27 87.5,38.23 90.3,38.23 96.9,31.62 96.9,30.61 R1_PINH1.2 96.9,30.48 96.9,25.4 76.07,4.57 35.56,4.57 35.31,4.83 31.62,4.83 31.37,4.57 22.23,4.57 11.68,15.11
IO/BOOT
  Top 0.127: R_BOOT.1 53.59,83.19 51.18,83.19 50.93,82.93 BOOT_BUTTON1.4 50.8,82.8 50.16,82.17 46.48,82.17 45.85,82.8 44.58,82.8 C6.1 44.45,82.8 44.45,66.42 24.51,46.48 24.51,36.7 U2.15
IO/CHANGE  (via drill 0.3)
  Top 0.127: R_CHANGE.1 69.09,83.95 67.18,83.95 65.79,82.55 CHANGE_BUTTON2.4 65.66,82.55 64.9,81.79 61.59,81.79 61.21,82.17 59.82,82.17 C10.1 59.69,82.3 v59.05,81.66 | v43.94,66.55 14.35,36.96 14.35,36.7 U2.23
  Bottom 0.127: v59.05,81.66 v43.94,66.55
MISO  (via drill 0.3)
  Top 0.127: v31.24,3.94 29.59,3.94 R8.1 | v33.53,6.22 41.27,6.22 48.13,13.08 48.13,15.62 D12.2 48.13,15.75 47.5,16.38 44.7,16.38 40.51,20.57 40.51,21.59 40.77,21.84 40.77,29.97 40.51,30.23 37.08,30.23 36.2,29.34 | 36.2,29.34 35.31,28.45 35.05,28.45 U1.2 | v9.14,45.21 9.14,36.7 U2.27 | v3.81,59.56 3.81,60.45 3.56,60.71 J4.P7 | v11.68,57.66 22.99,68.96 TP6.TP | v33.78,31.75 36.2,29.34
  Bottom 0.127: v33.53,6.22 v31.24,3.94 | v3.81,59.56 8.64,54.74 | 8.64,54.74 9.14,54.23 v9.14,45.21 22.61,31.75 v33.78,31.75 | v11.68,57.66 8.76,54.74 8.64,54.74
MOSI  (via drill 0.3)
  Top 0.127: v8.26,61.85 7.87,61.47 7.87,60.83 J4.P3 | v21.59,61.85 23.24,63.5 TP7.TP | v69.34,-7.87 69.34,-9.14 FH34SRJ-24S-0.5SH_99_.14 | v38.23,3.3 33.15,3.3 32.26,4.19 R7.1 32.13,4.19 31.37,3.43 v30.73,3.43 | v43.69,18.03 43.69,18.67 42.8,19.56 42.8,25.78 U1.5 | v30.73,8.64 28.7,10.67 D11.2 28.57,10.79 28.07,10.79 20.95,17.91 v19.94,17.91 | v15.24,17.91 15.49,18.16 15.49,19.05 U2.7
  Bottom 0.127: v21.59,61.85 v8.26,61.85 5.08,61.85 3.05,59.82 3.05,33.4 15.24,21.21 v15.24,17.91 v19.94,17.91 | v69.34,-7.87 49.4,-7.87 v38.23,3.3 43.69,8.76 v43.69,18.03 | v30.73,3.43 v30.73,8.64
N$1
  Top 0.127: R2_USB1.2 148.97,28.7 157.86,28.7 159,29.84 159.64,29.84 J2.A5
N$2
  Top 0.127: R2_USB.1 155.96,33.66 158.37,33.66 159,33.02 159.64,33.02 J2.B5
N$3
  Top 0.127: D7.1 78.11,37.47 78.11,36.7 80.52,34.29 80.52,18.67 R_CAPACITOR.2
N$5
  Top 0.127: R1_BAT.2 125.48,21.84 131.44,21.84 131.83,22.23 MCP73831.1
N$8
  Top 0.127: 96.39,2.03 94.11,-0.25 D4.1 | 96.39,2.03 96.65,2.29 103.12,2.29 C4.1 | 96.39,2.03 89.41,9.02 89.41,10.67 D3.2
N$9  (via drill 0.3)
  Top 0.127: v132.46,26.67 135,26.67 CHG_LED.C | v124.84,22.48 124.21,21.84 R1_BAT.1
  Bottom 0.127: v132.46,26.67 129.03,26.67 v124.84,22.48
N$10
  Top 0.127: R2_BAT.2 121.54,24.13 123.95,24.13 125.6,22.48 129.16,22.48 129.29,22.35 MCP73831.5
N$11
  Top 0.127: FH34SRJ-24S-0.5SH_99_.24 64.26,-9.14 58.17,-9.14 58.04,-9.02 57.15,-9.02 56.9,-8.76 56.9,-5.46 59.94,-2.41 59.94,0 57.66,2.29 56.64,2.29 55.24,0.89 55.24,-3.94 53.98,-5.21 53.98,-6.22 EPD_C12.2
N$12
  Top 0.127: 68.83,-9.14 68.45,-9.14 FH34SRJ-24S-0.5SH_99_.16 | 68.83,-9.14 68.83,-5.21 68.2,-4.57 EPD_C5.2 | 68.83,-9.14 FH34SRJ-24S-0.5SH_99_.15
N$13
  Top 0.127: FH34SRJ-24S-0.5SH_99_.20 66.29,-9.14 66.29,-6.99 65.66,-6.35 65.66,-5.33 66.29,-4.7 EPD_C8.2
N$14
  Top 0.127: FH34SRJ-24S-0.5SH_99_.22 65.28,-9.14 65.28,-8.76 64.77,-8.26 57.66,-8.26 EPD_C10.2
N$15
  Top 0.127: FH34SRJ-24S-0.5SH_99_.19 66.93,-9.14 66.93,-6.48 67.44,-5.97 67.44,-4.19 67.69,-3.94 69.22,-3.94 69.72,-4.45 EPD_C7.2
N$16  (via drill 0.3)
  Top 0.127: v68.2,-10.54 67.44,-9.78 67.44,-9.27 FH34SRJ-24S-0.5SH_99_.18 | v70.87,-5.21 71.5,-4.57 EPD_C6.2
  Bottom 0.127: v68.2,-10.54 70.48,-10.54 71.75,-9.27 71.75,-6.1 v70.87,-5.21
N$17
  Top 0.127: FH34SRJ-24S-0.5SH_99_.5 73.91,-9.14 73.91,-5.59 74.8,-4.7 EPD_C2.2
N$18
  Top 0.127: FH34SRJ-24S-0.5SH_99_.4 74.42,-9.14 74.42,-7.24 75.82,-5.84 75.82,-5.33 76.45,-4.7 EPD_C1.2
N$19
  Top 0.127: C_DELAY.2 55.37,75.56 51.56,75.56 IC1.5
N$20
  Top 0.127: 124.59,11.81 125.09,11.81 125.22,11.94 IC4.3 | 124.59,11.81 124.33,11.81 | 124.33,11.81 123.06,11.81 D2.1 | 124.33,11.81 124.33,9.02 C1_BAT1.1 | 124.59,11.81 124.59,13.34 124.84,13.59 124.97,13.59 125.22,13.84 IC4.1
PREVGH
  Top 0.127: EPD_C9.2 64.77,-4.7 65.41,-5.33 65.41,-6.48 65.79,-6.86 65.79,-9.14 FH34SRJ-24S-0.5SH_99_.21 65.91,-9.27 65.91,-9.65 67.31,-11.05 74.93,-11.05 78.23,-7.75 78.23,4.45 85.6,11.81 89.92,11.81 94.36,7.37 94.36,5.84 D5.1
PREVGL  (via drill 0.3)
  Top 0.127: v66.29,-11.05 64.9,-9.65 64.9,-9.27 FH34SRJ-24S-0.5SH_99_.23 | v72.52,-5.21 73.15,-4.57 EPD_C11.2 | v95.12,-0.38 97.54,-0.38 D4.2
  Bottom 0.127: v66.29,-11.05 70.36,-11.05 72.52,-8.89 v72.52,-5.21 77.34,-0.38 v95.12,-0.38
RESE
  Top 0.127: FH34SRJ-24S-0.5SH_99_.3 74.93,-9.14 74.93,-8.64 77.72,-5.84 77.72,-4.32 70.87,2.54 57.66,2.54 57.28,2.92 R3.2 57.15,2.92 56.9,2.92 54.86,0.89 54.86,-1.4 Q3.2
RESE'
  Top 0.127: R3.1 57.28,1.65 58.04,0.89 58.04,-1.91 R2.2 58.04,-2.03 54.61,-5.46 54.61,-6.73 53.72,-7.62 53.72,-8.51 SJ1.2
RESET  (via drill 0.3)
  Top 0.127: R_RESET.1 28.7,85.34 v27.94,85.34 26.67,85.34 25.78,84.45 RESET_BUTTON.4 25.65,84.33 24.89,83.57 21.46,83.57 20.7,84.33 18.8,84.33 C5.1 18.67,84.33 18.67,75.69 11.18,68.2 11.18,48.26 7.24,44.32 7.24,32.38 10.41,29.21 10.41,19.18 U2.3 | v47.75,75.69 48.64,75.69 IC1.1
  Bottom 0.127: v47.75,75.69 37.59,75.69 v27.94,85.34
RTC_RST  (via drill 0.3)
  Top 0.127: v26.54,33.02 23.24,36.32 23.24,36.58 U2.16 | v81.03,33.02 81.03,31.75 81.15,31.62 U3.4
  Bottom 0.127: v81.03,33.02 v26.54,33.02
RX
  Top 0.127: U2.24 13.08,36.7 13.08,51.56 43.81,82.3 43.81,84.58 44.7,85.47 69.22,85.47 78.11,76.58 78.11,70.1 78.74,69.47 84.84,69.47 85.98,70.61 TP2.TP
SCK  (via drill 0.3)
  Top 0.127: v6.22,59.44 5.71,59.94 5.71,60.71 J4.P5 | v22.23,58.55 23.24,57.53 TP8.TP | v69.85,-8.26 69.85,-9.14 FH34SRJ-24S-0.5SH_99_.13 | v37.08,3.81 36.07,3.81 R6.1 | v43.18,18.54 42.04,19.68 42.04,26.16 42.67,26.8 42.67,27.05 U1.6 | v35.31,7.75 32.26,10.79 D10.2 | v21.84,21.08 16,21.08 14.35,19.43 14.35,19.18 U2.6
  Bottom 0.127: v22.23,58.55 21.34,59.44 v6.22,59.44 4.57,59.44 3.94,60.07 3.68,60.07 3.3,59.69 3.3,34.8 18.03,20.07 20.83,20.07 v21.84,21.08 22.23,21.08 35.31,8 v35.31,7.75 38.1,4.95 38.23,4.95 | v69.85,-8.26 69.6,-8.26 69.47,-8.38 49.28,-8.38 v37.08,3.81 38.23,4.95 | v43.18,18.54 43.18,9.91 38.23,4.95
SCL  (via drill 0.3)
  Top 0.127: v159.26,-20.83 159.89,-21.46 R2_PINH.1 | v163.83,-16.26 163.83,-15.88 164.08,-15.62 SENSOR2.4 | v146.43,26.92 141.86,26.92 U4.7 | v164.47,20.7 v164.47,-1.91 164.47,-2.67 J3.4 | v24.38,30.1 18.16,36.32 18.16,36.58 U2.20 | v84.2,23.75 84.2,23.37 84.96,22.61 84.96,22.35 U3.16
  Bottom 0.127: v159.26,-20.83 v163.83,-16.26 163.83,-2.54 v164.47,-1.91 | v164.47,20.7 154.43,30.73 150.5,30.73 146.69,26.92 v146.43,26.92 133.86,26.92 132.46,28.32 88.77,28.32 v84.2,23.75 77.85,30.1 v24.38,30.1
SDA  (via drill 0.3)
  Top 0.127: v164.72,-20.83 164.47,-21.08 163.96,-21.08 R1_PINH.1 | v164.72,-16.26 164.97,-16 164.97,-15.37 164.47,-14.86 164.21,-14.86 SENSOR2.3 | v148.08,27.43 141.86,27.43 U4.8 | v163.58,20.95 v163.58,-1.4 163.58,-3.05 164.21,-3.68 164.47,-3.68 J3.3 | v26.16,29.59 19.43,36.32 19.43,36.58 U2.19 | U3.15 83.69,22.35 83.57,22.48 v83.57,23.75 87.63,27.81 v88.9,27.81
  Bottom 0.127: v164.72,-20.83 v164.72,-16.26 164.72,-2.29 164.97,-2.03 164.97,-1.78 164.59,-1.4 v163.58,-1.4 | v163.58,20.95 154.05,30.48 153.8,30.48 150.75,27.43 v148.08,27.43 147.57,27.43 146.56,26.42 133.99,26.42 132.59,27.81 v88.9,27.81 | v26.16,29.59 77.72,29.59 v83.57,23.75
SRC
  Top 0.127: 104.39,2.41 104.27,2.41 100.97,5.71 99.19,5.71 | 104.39,2.41 104.52,2.41 C4.2 104.39,2.41 | 99.19,5.71 97.92,5.71 D5.2 | 99.19,5.71 99.19,11.05 98.17,12.06 85.47,12.06 77.72,4.32 57.02,4.32 54.1,1.4 54.1,0.76 Q3.3 | 104.39,2.41 100.97,-1.02 90.3,-1.02 85.64,3.64 L1.1
SS_SD
  Top 0.127: R10.1 5.84,79.76 5.84,75.56 7.87,73.53 7.87,62.87 8.89,61.85 8.89,61.21 J4.P2 8.89,61.09 8.89,46.74 1.02,38.86 1.02,37.59 0.38,36.96 0.38,18.8 1.91,17.27 10.16,17.27 11.68,18.8 11.68,19.05 U2.4 11.81,19.18 11.81,19.43 13.72,21.34 18.54,21.34 29.46,32.26 38.86,32.26 41.27,29.84 41.27,21.08 D8.2
TX
  Top 0.127: U2.25 11.81,36.7 11.81,51.82 21.08,61.09 21.08,63.37 45.09,87.38 68.83,87.38 79.25,76.96 79.25,70.74 TP1.TP
USB_D+  (via drill 0.3)
  Top 0.127: v154.05,32 154.05,30.86 152.78,29.59 152.53,29.59 D1.3 | v33.91,19.56 24.89,19.56 24.51,19.18 U2.14
  Bottom 0.127: v154.05,32 59.44,32 58.04,30.61 24.26,30.61 23.88,30.23 23.88,29.59 v33.91,19.56
USB_D-  (via drill 0.3)
  Top 0.127: v135.89,25.4 141.86,31.37 152.4,31.37 D1.1 | v35.05,20.07 23.88,20.07 23.24,19.43 23.24,19.18 U2.13
  Bottom 0.127: v135.89,25.4 128.4,25.4 124.97,21.97 84.71,21.97 81.92,24.77 81.92,25.02 81.53,25.4 40.39,25.4 v35.05,20.07
VBAT
  Top 0.127: U4.2 139.83,26.8 139.83,26.42 U4.3 139.7,26.29 139.45,26.29 134.75,21.59 130.56,21.59 128.4,19.43 128.14,19.43 C2_BAT.1 128.02,19.43 125.09,19.43 120.78,23.75 120.78,24.77 121.03,25.02 131.95,25.02 | 131.95,25.02 131.95,27.43 144.4,39.88 TP3.TP | 131.95,25.02 131.95,24.26 MCP73831.3
VBUS  (via drill 0.3)
  Top 0.127: D2.2 122.94,13.72 122.94,12.83 122.3,12.19 122.3,9.78 123.83,8.26 127.76,8.26 131.06,11.56 135.13,11.56 136.53,10.16 138.05,10.16 138.3,10.41 138.3,11.43 137.67,12.06 R1_PWRUSB.2 137.67,12.19 137.79,12.32 137.79,19.68 Q1.1 137.92,19.81 137.92,20.95 138.81,21.84 Q1.3 138.94,21.97 150.5,21.97 | TP14.TP 135.13,25.27 CHG_LED.A 135.13,25.15 v135.13,24.26 | C1_BAT.1 125.22,24.13 125.86,24.77 128.78,24.77 129.29,24.26 MCP73831.4 129.41,24.26 v130.94,24.26 | D1.5 154.56,30.48 v153.42,29.34 | v152.65,27.81 153.29,27.18 C4_USB.1 153.16,27.05 153.16,24.51 C5_USB.1 153.03,24.38 152.15,24.38 150.5,22.73 150.5,21.97 | 150.5,21.97 150.5,19.05 150.62,18.92 152.4,18.92 154.31,20.83 155.96,20.83 PFMF.050.1.2
  Bottom 0.127: v153.42,29.34 153.42,28.57 v152.65,27.81 149.1,24.26 v135.13,24.26 v130.94,24.26
VRTC
  Top 0.127: 82.42,20.95 82.42,22.23 U3.14 | 82.42,20.95 82.42,18.03 81.03,16.64 80.77,16.64 79.38,18.03 79.38,18.54 R_CAPACITOR.1 79.25,18.67 78.11,19.81 78.11,23.11 75.31,25.91 75.31,32.38 77.09,34.16 77.09,35.18 C8.1 | 82.42,20.95 85.34,20.95 86.23,21.84 90.68,21.84 C10_SUPERCAP.1
VUSB
  Top 0.127: J2.A9 159.64,33.66 159.64,33.53 J2.B4 159.77,33.4 160.27,33.4 160.78,32.89 160.78,29.46 160.27,28.96 159.77,28.96 J2.B9 159.64,28.83 159.64,28.7 J2.A4 159.64,28.57 159,28.57 154.94,24.51 154.94,23.88 152.02,20.95 151.64,20.95 PFMF.050.1.1